# EAGLE board RJ45_Connectors_Board (EAGLE 7.1.0)
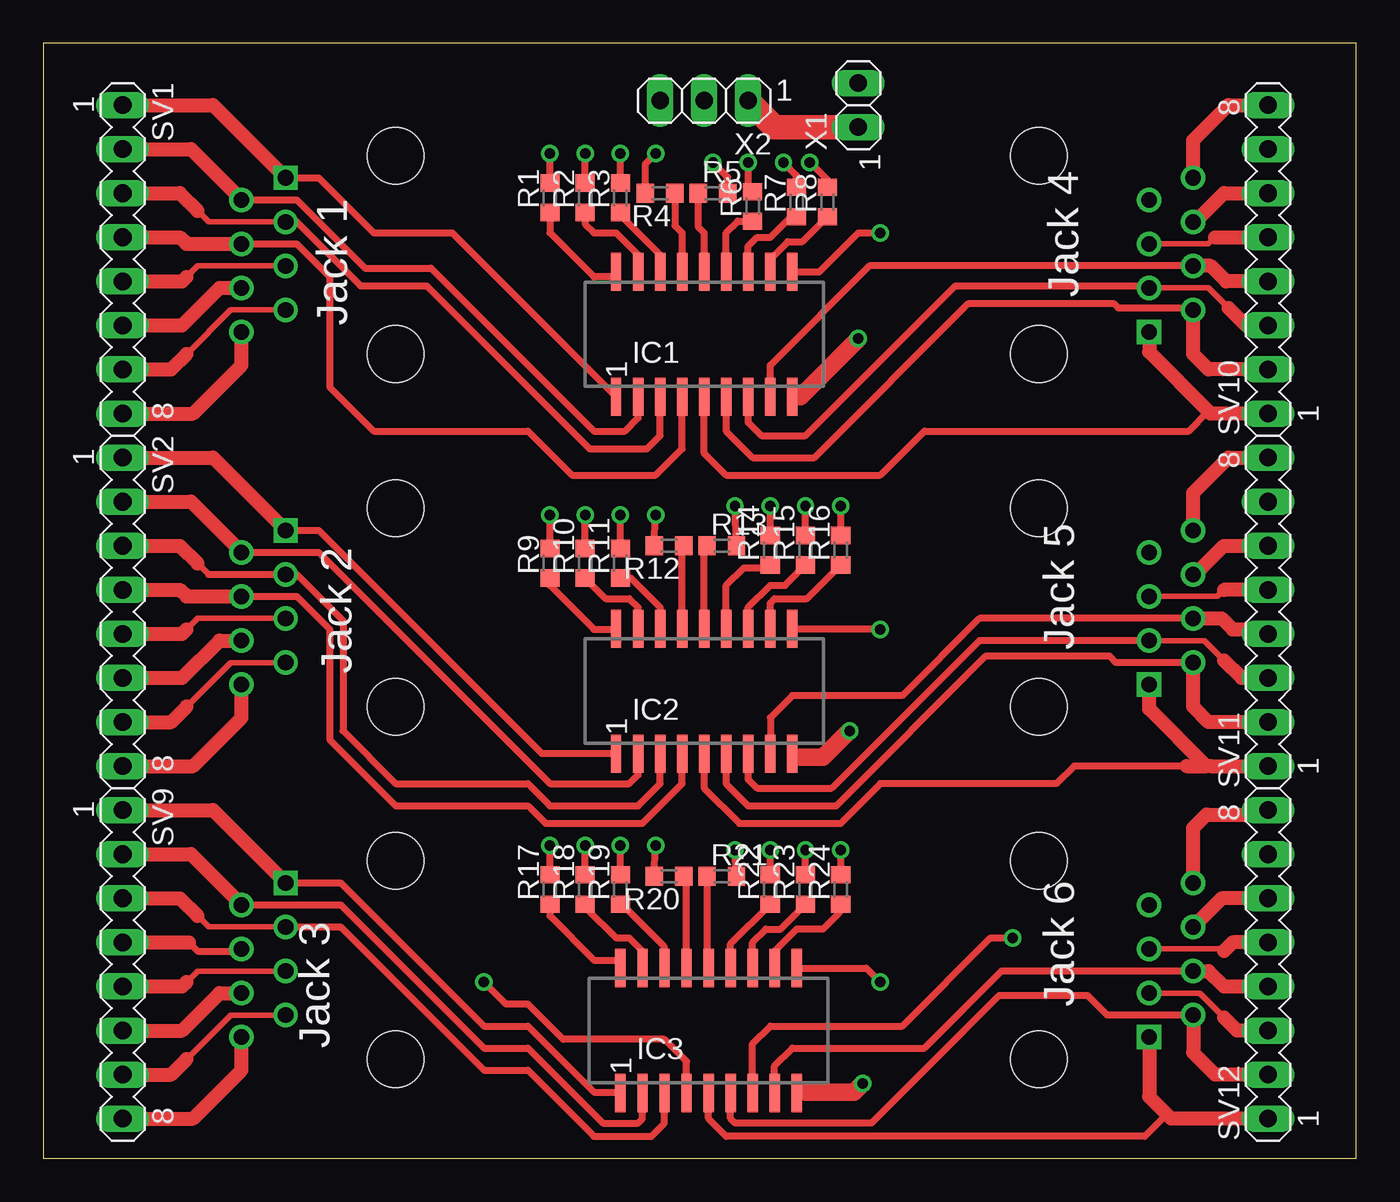
[diagram p0: board, top side]
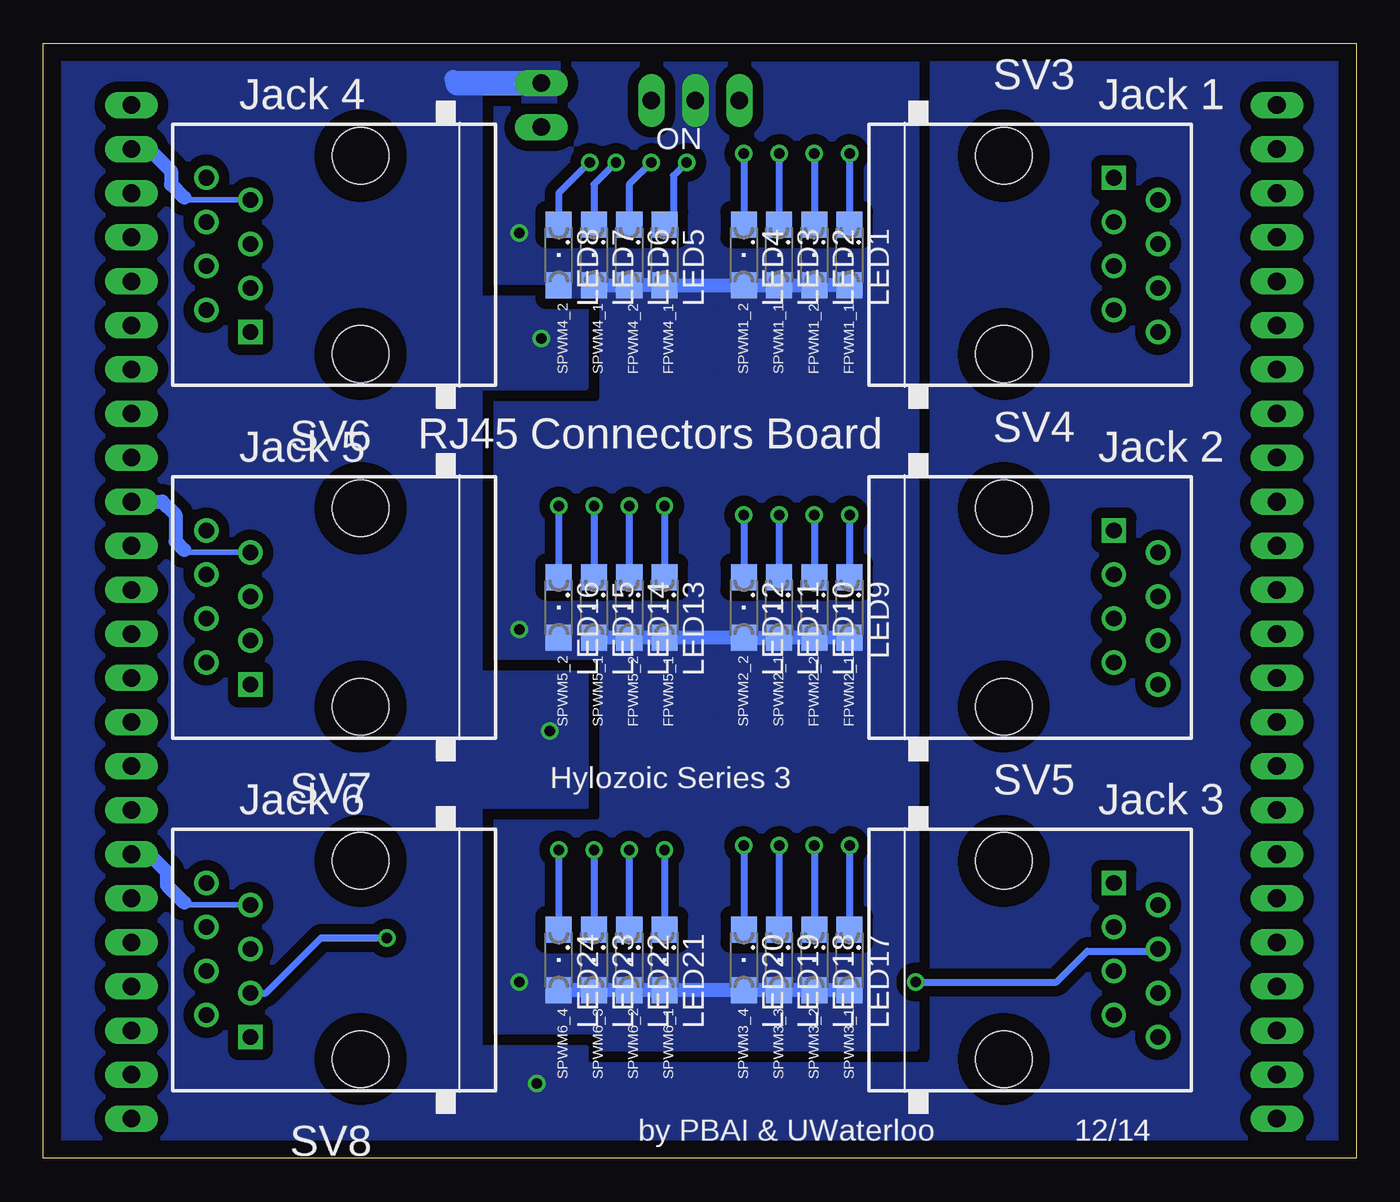
[diagram p1: board, bottom side, seen from below]

Size 75.69 x 64.26 mm. Coordinates in mm from the lower left corner, seen from the top.
Outline: 0,0 75.69,0 75.69,64.26 0,64.26 0,0
Copper layers (1*16): Top 0.035mm / dielectric 1.5mm / Bottom 0.035mm
Design rules "default *": minimum track width 10mil, minimum drill 20mil, track to track 8mil, track to pad 8mil, pad to pad 8mil, via to via 8mil, smd to smd 8mil, copper to edge 40mil, drill to drill 8mil, minimum pad ring 10mil, minimum via ring 8mil, stop-mask expansion 4mil, vias tented up to drill 0mil, thermal gap 10mil

## Footprints (pad centres in the part's own frame; a part is rotated, then mirrored left to right if it is on the bottom)
SOP18 = smd 0.6 x 2.2: 1 -5.08,-3.6; 2 -3.81,-3.6; 3 -2.54,-3.6; 4 -1.27,-3.6; 5 0,-3.6; 6 1.27,-3.6; 7 2.54,-3.6; 8 3.81,-3.6; 9 5.08,-3.6; 10 5.08,3.6; 11 3.81,3.6; 12 2.54,3.6; 13 1.27,3.6; 14 0,3.6; 15 -1.27,3.6; 16 -2.54,3.6; 17 -3.81,3.6; 18 -5.08,3.6
SML1206 = smd 1.5 x 1.5: A 1.75,0; C -1.75,0
R0603 = smd 1 x 1.1: 1 -0.85,0; 2 0.85,0
MA08-1 = drill 1.016 long: 1 -8.89,0; 2 -6.35,0; 3 -3.81,0; 4 -1.27,0; 5 1.27,0; 6 3.81,0; 7 6.35,0; 8 8.89,0
RJ45-NO-SHIELD = drill 0.9 pad 1.4 square: 1 -4.445,6.35 | drill 0.9 pad 1.4: 2 -3.175,8.89; 3 -1.905,6.35; 4 -0.635,8.89; 5 0.635,6.35; 6 1.905,8.89; 7 3.175,6.35; 8 4.445,8.89 | hole 3.251: -5.715,0; 5.715,0
1X02 = drill 1.016 long: 1 -1.27,0; 2 1.27,0
1X03 = drill 1.016 long: 1 -2.54,0; 2 0,0; 3 2.54,0

## Placement (x,y rotation side)
IC1  [SOP18]  38.1,47.5 0 top
IC2  [SOP18]  38.1,26.92 0 top
IC3  [SOP18]  38.35,7.37 0 top
LED1  [SML1206]  29.21,52.07 270 bottom
LED2  [SML1206]  31.24,52.07 270 bottom
LED3  [SML1206]  33.27,52.07 270 bottom
LED4  [SML1206]  35.31,52.07 270 bottom
LED5  [SML1206]  39.88,52.07 270 bottom
LED6  [SML1206]  41.91,52.07 270 bottom
LED7  [SML1206]  43.94,52.07 270 bottom
LED8  [SML1206]  45.97,52.07 270 bottom
LED9  [SML1206]  29.21,31.75 270 bottom
LED10  [SML1206]  31.24,31.75 270 bottom
LED11  [SML1206]  33.27,31.75 270 bottom
LED12  [SML1206]  35.31,31.75 270 bottom
LED13  [SML1206]  39.88,31.75 270 bottom
LED14  [SML1206]  41.91,31.75 270 bottom
LED15  [SML1206]  43.94,31.75 270 bottom
LED16  [SML1206]  45.97,31.75 270 bottom
LED17  [SML1206]  29.21,11.43 270 bottom
LED18  [SML1206]  31.24,11.43 270 bottom
LED19  [SML1206]  33.27,11.43 270 bottom
LED20  [SML1206]  35.31,11.43 270 bottom
LED21  [SML1206]  39.88,11.43 270 bottom
LED22  [SML1206]  41.91,11.43 270 bottom
LED23  [SML1206]  43.94,11.43 270 bottom
LED24  [SML1206]  45.97,11.43 270 bottom
R1  470  [R0603]  29.21,55.37 90 top
R2  470  [R0603]  31.24,55.37 90 top
R3  470  [R0603]  33.27,55.37 90 top
R4  470  [R0603]  35.56,55.63 180 top
R5  470  [R0603]  38.61,55.63 0 top
R6  470  [R0603]  40.89,54.86 90 top
R7  470  [R0603]  43.43,55.12 90 top
R8  470  [R0603]  45.21,55.12 90 top
R9  470  [R0603]  29.21,34.29 90 top
R10  470  [R0603]  31.24,34.29 90 top
R11  470  [R0603]  33.27,34.29 90 top
R12  470  [R0603]  36.07,35.31 180 top
R13  470  [R0603]  39.12,35.31 0 top
R14  470  [R0603]  41.91,35.05 90 top
R15  470  [R0603]  43.94,35.05 90 top
R16  470  [R0603]  45.97,35.05 90 top
R17  470  [R0603]  29.21,15.49 90 top
R18  470  [R0603]  31.24,15.49 90 top
R19  470  [R0603]  33.27,15.49 90 top
R20  470  [R0603]  36.07,16.26 180 top
R21  470  [R0603]  39.12,16.26 0 top
R22  470  [R0603]  41.91,15.49 90 top
R23  470  [R0603]  43.94,15.49 90 top
R24  470  [R0603]  45.97,15.49 90 top
SV1  [MA08-1]  4.57,51.82 270 top
SV2  [MA08-1]  4.57,31.5 270 top
SV3  RJ45-8X  [RJ45-NO-SHIELD]  20.32,52.07 270 bottom
SV4  RJ45-8X  [RJ45-NO-SHIELD]  20.32,31.75 270 bottom
SV5  RJ45-8X  [RJ45-NO-SHIELD]  20.32,11.43 270 bottom
SV6  RJ45-8X  [RJ45-NO-SHIELD]  57.4,52.07 90 bottom
SV7  RJ45-8X  [RJ45-NO-SHIELD]  57.4,31.75 90 bottom
SV8  RJ45-8X  [RJ45-NO-SHIELD]  57.4,11.43 90 bottom
SV9  [MA08-1]  4.57,11.18 270 top
SV10  [MA08-1]  70.61,51.82 90 top
SV11  [MA08-1]  70.61,31.5 90 top
SV12  [MA08-1]  70.61,11.18 90 top
X1  [1X02]  46.99,60.71 90 top
X2  [1X03]  38.1,60.96 180 top

## Library data of the parts
IC1-IC3 R1-R24 X1 X2 = CBLA_Test_bed_Library
LED1-LED24 = led
SV1 SV2 SV9-SV12 = con-lstb; OC_FARNELL: unknown; OC_NEWARK: unknown
SV3-SV8 = CBLA_Test_bed_Library; MPN: RJ45-8X; OC_FARNELL: unknown; OC_NEWARK: 16R6101

## Nets
+5V: IC1.10 IC2.10 IC3.10 LED1.A LED2.A LED3.A LED4.A LED5.A LED6.A LED7.A LED8.A LED9.A LED10.A LED11.A LED12.A LED13.A LED14.A LED15.A LED16.A LED17.A LED18.A LED19.A LED20.A LED21.A LED22.A LED23.A LED24.A X2.2
+5VJUMP: X1.1 X2.1
A0: SV8.5 SV12.5
A1: SV8.6 SV12.6
A2: SV7.5 SV11.5
A3: SV7.6 SV11.6
A8: SV6.5 SV10.5
A9: SV6.6 SV10.6
A11: SV1.5 SV3.5
A12: SV2.5 SV4.5
A13: SV1.6 SV3.6
A15: SV2.6 SV4.6
A16: SV5.5 SV9.5
A17: SV5.6 SV9.6
FPWM_1_1: IC1.1 SV1.1 SV3.1
FPWM_1_2: IC1.2 SV1.2 SV3.2
FPWM_2_1: IC2.1 SV2.1 SV4.1
FPWM_2_2: IC2.2 SV2.2 SV4.2
FPWM_4_1: IC1.5 SV6.1 SV10.1
FPWM_4_2: IC1.6 SV6.2 SV10.2
FPWM_5_1: IC2.5 SV7.1 SV11.1
FPWM_5_2: IC2.6 SV7.2 SV11.2
GND: IC1.9 IC2.9 IC3.9 X1.2
MUL_SCL_1: SV1.7 SV3.7
MUL_SCL_2: SV2.7 SV4.7
MUL_SCL_3: SV5.7 SV9.7
MUL_SCL_4: SV6.7 SV10.7
MUL_SCL_5: SV7.7 SV11.7
MUL_SCL_6: SV8.7 SV12.7
MUL_SDA_1: SV1.8 SV3.8
MUL_SDA_2: SV2.8 SV4.8
MUL_SDA_3: SV5.8 SV9.8
MUL_SDA_4: SV6.8 SV10.8
MUL_SDA_5: SV7.8 SV11.8
MUL_SDA_6: SV8.8 SV12.8
N$1: IC1.18 R1.1
N$2: LED1.C R1.2
N$3: IC1.17 R2.1
N$4: IC1.16 R3.1
N$5: IC1.15 R4.1
N$6: IC1.14 R5.1
N$7: IC1.13 R6.1
N$8: IC1.12 R7.1
N$10: IC1.11 R8.1
N$11: LED2.C R2.2
N$12: LED3.C R3.2
N$13: LED4.C R4.2
N$14: LED5.C R5.2
N$15: LED6.C R6.2
N$16: LED7.C R7.2
N$17: LED8.C R8.2
N$18: IC2.18 R9.1
N$19: LED9.C R9.2
N$20: IC2.17 R10.1
N$21: IC2.16 R11.1
N$22: IC2.15 R12.1
N$23: IC2.14 R13.1
N$24: IC2.13 R14.1
N$25: IC2.12 R15.1
N$26: IC2.11 R16.1
N$27: LED10.C R10.2
N$28: LED11.C R11.2
N$29: LED12.C R12.2
N$30: LED13.C R13.2
N$31: LED14.C R14.2
N$32: LED15.C R15.2
N$33: LED16.C R16.2
N$34: IC3.18 R17.1
N$35: LED17.C R17.2
N$36: IC3.17 R18.1
N$37: IC3.16 R19.1
N$38: IC3.15 R20.1
N$39: IC3.14 R21.1
N$40: IC3.13 R22.1
N$41: IC3.12 R23.1
N$42: IC3.11 R24.1
N$43: LED18.C R18.2
N$44: LED19.C R19.2
N$45: LED20.C R20.2
N$46: LED21.C R21.2
N$47: LED22.C R22.2
N$48: LED23.C R23.2
N$49: LED24.C R24.2
SPWM_1_1: IC1.3 SV1.3 SV3.3
SPWM_1_2: IC1.4 SV1.4 SV3.4
SPWM_2_1: IC2.3 SV2.3 SV4.3
SPWM_2_2: IC2.4 SV2.4 SV4.4
SPWM_3_1: IC3.1 SV5.1 SV9.1
SPWM_3_2: IC3.2 SV5.2 SV9.2
SPWM_3_3: IC3.3 SV5.3 SV9.3
SPWM_3_4: IC3.4 SV5.4 SV9.4
SPWM_4_1: IC1.7 SV6.3 SV10.3
SPWM_4_2: IC1.8 SV6.4 SV10.4
SPWM_5_1: IC2.7 SV7.3 SV11.3
SPWM_5_2: IC2.8 SV7.4 SV11.4
SPWM_6_1: IC3.5 SV8.1 SV12.1
SPWM_6_2: IC3.6 SV8.2 SV12.2
SPWM_6_3: IC3.7 SV8.3 SV12.3
SPWM_6_4: IC3.8 SV8.4 SV12.4

## Tracks (layer width: path | path; a pad name or v marks a point on that pad's centre or on a via)
+5V  (via drill 0.6)
  Top 0.406: IC1.10 44.75,51.1 46.99,53.34 v48.26,53.34 | IC2.10 48.22,30.52 v48.26,30.48 | IC3.10 47.45,10.97 v48.26,10.16
  Bottom 0.813: LED7.A LED6.A LED5.A LED4.A LED3.A LED2.A LED1.A | LED15.A LED14.A LED13.A LED12.A LED11.A LED10.A LED9.A | LED17.A LED18.A LED19.A LED20.A LED21.A LED22.A LED23.A LED24.A
  pour Bottom (isolate 0.61, rank 2, no thermals, hatched): 25.4,63.5 25.4,6.35 49.53,6.35 49.53,63.5
+5VJUMP
  Top 1.422: X2.1 42.16,59.44 X1.1
A0
  Top 0.305: SV8.5 67.94,12.06 68.07,11.94
  Top 0.813: SV12.5 68.58,12.45 68.07,11.94
A1
  Top 0.813: SV12.6 67.94,14.99 SV8.6
A2
  Top 0.305: 68.07,32.77 67.69,32.39 SV7.5
  Top 0.813: SV11.5 68.07,32.77
A3
  Top 0.813: SV7.6 66.42,33.66 68.07,35.31 SV11.6
A8
  Top 0.305: SV6.5 67.18,52.7 67.56,53.09
  Top 0.813: 67.56,53.09 SV10.5
A9
  Top 0.813: SV6.6 66.42,53.97 68.07,55.63 SV10.6
A11
  Top 0.305: 8.26,50.8 8.89,51.43 SV3.5
  Top 0.813: SV1.5 8,50.55 8.26,50.8
A12
  Top 0.305: 8.26,30.48 8.89,31.11 SV4.5
  Top 0.813: SV2.5 8,30.23 8.26,30.48
A13
  Top 0.813: SV1.6 8,48.01 10.16,50.16 SV3.6
A15
  Top 0.813: SV2.6 8,27.69 10.16,29.84 SV4.6
A16
  Top 0.305: 8.26,10.16 8.89,10.79 SV5.5
  Top 0.813: SV9.5 8,9.91 8.26,10.16
A17
  Top 0.813: SV9.6 8,7.37 10.16,9.52 SV5.6
FPWM_1_1
  Top 0.406: SV3.1 15.88,56.52 19.05,53.34 23.58,53.34 IC1.1
  Top 0.813: SV1.1 9.78,60.71 SV3.1
FPWM_1_2
  Top 0.406: SV3.2 14.61,55.24 18.54,51.31 22.35,51.31 31.75,41.91 33.53,41.91 34.29,42.67 IC1.2
  Top 0.813: SV1.2 8.51,58.17 SV3.2
FPWM_2_1
  Top 0.406: SV4.1 15.88,36.19 27.3,24.76 27.94,24.13 28.75,23.32 IC2.1
  Top 0.813: SV2.1 9.78,40.39 SV4.1
FPWM_2_2
  Top 0.406: SV4.2 15.88,34.92 29.21,21.59 33.78,21.59 34.29,22.1 IC2.2
  Top 0.813: SV2.2 8.51,37.85 SV4.2
FPWM_4_1
  Top 0.406: IC1.5 38.1,40.64 39.37,39.37 48.26,39.37 50.8,41.91 66.04,41.91 67.18,43.05
  Top 0.813: SV10.1 67.31,42.93 67.18,43.05 63.75,46.48 SV6.1
FPWM_4_2
  Top 0.406: IC1.6 39.37,41.91 40.89,40.39 44.45,40.39 53.34,49.28 61.72,49.28 61.98,49.02 66.17,49.02 SV6.2
  Top 0.813: SV10.2 67.18,45.47 66.29,46.36 SV6.2
FPWM_5_1
  Top 0.406: IC2.5 38.1,21.34 40.13,19.3 45.97,19.3 48.26,21.59 58.42,21.59 59.44,22.61 67.31,22.61
  Top 0.813: 65.91,22.61 67.06,22.61 | SV11.1 67.31,22.61 67.06,22.61 | 67.06,22.61 63.75,25.91 SV7.1
FPWM_5_2
  Top 0.406: IC2.6 39.37,21.59 40.64,20.32 45.72,20.32 54.36,28.96 61.47,28.96 61.85,28.57 SV7.2
  Top 0.813: SV11.2 67.18,25.15 66.29,26.04 SV7.2
GND  (via drill 0.6)
  Top 0.406: IC1.9 43.64,43.9 | IC3.9 43.64,3.77 43.69,3.81 | 43.43,23.37 43.43,23.11 43.18,22.86 IC2.9 43.39,23.11 43.69,23.11
  Top 0.61: 43.69,3.81 43.94,3.81
  Top 1.016: 43.64,43.9 v46.99,47.24 | v46.48,24.64 44.96,23.11 43.69,23.11 | v47.24,4.32 46.74,3.81 43.94,3.81
  Bottom 1.016: 51.82,61.98 52.07,62.23
  Bottom 1.422: X1.2 51.82,61.98
  pour Bottom (isolate 0.61, rank 3, no thermals, hatched): 0,64.77 76.2,64.77 76.2,0 0,0
  pour Bottom (isolate 0.61, no thermals, hatched): 44.45,26.67 44.45,20.32 54.61,20.32 54.61,27.94 44.45,27.94
  pour Bottom (isolate 0.61, no thermals, hatched): 54.61,6.35 44.45,6.35 44.45,1.27 54.61,1.27
  pour Bottom (isolate 0.61, no thermals, hatched): 54.61,49.53 44.45,49.53 44.45,44.45 54.61,44.45
MUL_SCL_1
  Top 0.305: 8.26,46.36 10.79,48.89 SV3.7
  Top 0.813: SV1.7 7.37,45.47 8.26,46.36
MUL_SCL_2
  Top 0.305: 8.26,26.04 10.79,28.57 SV4.7
  Top 0.813: SV2.7 7.37,25.15 8.26,26.04
MUL_SCL_3
  Top 0.305: 8.26,5.71 10.79,8.25 SV5.7
  Top 0.813: SV9.7 7.37,4.83 8.26,5.71
MUL_SCL_4
  Bottom 0.305: SV6.7 67.44,55.24 67.56,55.37
  Bottom 0.813: SV10.7 69.6,58.17 68.33,56.9 68.33,56.13 67.56,55.37
MUL_SCL_5
  Bottom 0.305: SV7.7 67.44,34.92 67.56,35.05
  Bottom 0.813: SV11.7 68.83,37.85 68.07,37.08 68.07,35.56 67.56,35.05
MUL_SCL_6
  Bottom 0.305: SV8.7 67.44,14.6 67.56,14.73
  Bottom 0.813: SV12.7 69.6,17.53 68.58,16.51 68.58,15.75 67.56,14.73
MUL_SDA_1
  Top 0.813: SV1.8 8.64,42.93 11.43,45.72 SV3.8
MUL_SDA_2
  Top 0.813: SV2.8 8.64,22.61 11.43,25.4 SV4.8
MUL_SDA_3
  Top 0.813: SV9.8 8.64,2.29 11.43,5.08 SV5.8
MUL_SDA_4
  Top 0.813: SV6.8 66.29,58.67 68.33,60.71 SV10.8
MUL_SDA_5
  Top 0.813: SV7.8 66.29,38.35 68.33,40.39 SV11.8
MUL_SDA_6
  Top 0.813: SV8.8 66.29,19.05 67.06,19.81 70.36,19.81 SV12.8
N$1
  Top 0.406: R1.1 29.21,53.34 31.75,50.8 32.72,50.8 IC1.18
N$2  (via drill 0.6)
  Top 0.406: R1.2 v29.21,57.91
  Bottom 0.406: v29.21,57.91 LED1.C
N$3
  Top 0.406: IC1.17 34.29,52.07 33.02,53.34 31.75,53.34 31.24,53.85 R2.1
N$4
  Top 0.406: R3.1 33.27,54.36 35.56,52.07 IC1.16
N$5
  Top 0.406: R4.1 36.41,53.76 36.83,53.34 IC1.15
N$6
  Top 0.406: R5.1 37.76,53.68 38.1,53.34 IC1.14
N$7
  Top 0.406: IC1.13 39.37,53.34 40.04,54.01 R6.1
N$8
  Top 0.406: IC1.12 40.64,52.58 41.15,53.09 41.91,53.09 43.09,54.27 R7.1
N$10
  Top 0.406: IC1.11 41.91,51.82 42.93,52.83 43.78,52.83 R8.1
N$11  (via drill 0.6)
  Top 0.406: R2.2 v31.24,57.91
  Bottom 0.406: v31.24,57.91 LED2.C
N$12  (via drill 0.6)
  Top 0.406: R3.2 v33.27,57.91
  Bottom 0.406: v33.27,57.91 LED3.C
N$13  (via drill 0.6)
  Top 0.406: R4.2 34.71,57.32 v35.31,57.91
  Bottom 0.406: v35.31,57.91 LED4.C
N$14  (via drill 0.6)
  Top 0.406: R5.2 39.46,56.55 v38.61,57.4
  Bottom 0.406: v38.61,57.4 39.37,56.64 39.37,53.34 39.85,53.82 LED5.C
N$15  (via drill 0.6)
  Top 0.406: v40.64,57.4 40.64,55.97 R6.2
  Bottom 0.406: v40.64,57.4 41.91,56.13 LED6.C
N$16  (via drill 0.6)
  Top 0.406: R7.2 43.43,56.64 v42.67,57.4
  Bottom 0.406: v42.67,57.4 43.94,56.13 LED7.C
N$17  (via drill 0.6)
  Top 0.406: R8.2 45.21,56.39 v44.2,57.4
  Bottom 0.406: v44.2,57.4 45.97,55.63 LED8.C
N$18
  Top 0.406: R9.1 29.21,33.02 31.75,30.48 32.81,30.48 IC2.18
N$19  (via drill 0.6)
  Top 0.406: R9.2 v29.21,37.08
  Bottom 0.406: v29.21,37.08 LED9.C
N$20
  Top 0.406: IC2.17 34.29,31.75 33.78,32.26 32.42,32.26 R10.1
N$21
  Top 0.406: R11.1 33.87,33.44 35.56,31.75 IC2.16
N$22
  Top 0.406: IC2.15 36.83,35.22 R12.1
N$23
  Top 0.406: IC2.14 38.1,35.14 R13.1
N$24
  Top 0.406: IC2.13 39.37,33.02 40.39,34.04 41.74,34.04 R14.1
N$25
  Top 0.406: 40.64,30.48 IC2.12 40.64,31.75 41.91,33.02 42.76,33.02 R15.1
N$26
  Top 0.406: IC2.11 41.91,32 42.16,32.26 44.03,32.26 R16.1
N$27  (via drill 0.6)
  Top 0.406: R10.2 v31.24,37.08
  Bottom 0.406: v31.24,37.08 LED10.C
N$28  (via drill 0.6)
  Top 0.406: R11.2 v33.27,37.08
  Bottom 0.406: v33.27,37.08 LED11.C
N$29  (via drill 0.6)
  Top 0.406: R12.2 v35.31,37.08
  Bottom 0.406: v35.31,37.08 LED12.C
N$30  (via drill 0.6)
  Top 0.406: R13.2 v39.88,37.59
  Bottom 0.406: v39.88,37.59 LED13.C
N$31  (via drill 0.6)
  Top 0.406: R14.2 v41.91,37.59
  Bottom 0.406: v41.91,37.59 LED14.C
N$32  (via drill 0.6)
  Top 0.406: R15.2 v43.94,37.59
  Bottom 0.406: v43.94,37.59 LED15.C
N$33  (via drill 0.6)
  Top 0.406: R16.2 v45.97,37.59
  Bottom 0.406: v45.97,37.59 LED16.C
N$34
  Top 0.406: R17.1 29.21,13.97 31.75,11.43 33.27,11.43 IC3.18 33.27,10.41
N$35  (via drill 0.6)
  Top 0.406: R17.2 v29.21,18.03
  Bottom 0.406: v29.21,18.03 LED17.C
N$36
  Top 0.406: R18.1 31.33,14.64 31.33,14.39 33.02,12.7 33.78,12.7 34.54,11.94 IC3.17
N$37
  Top 0.406: R19.1 33.36,14.64 35.81,12.19 IC3.16
N$38
  Top 0.406: IC3.15 37.08,16.09 R20.1
N$39
  Top 0.406: R21.1 38.27,11.05 IC3.14
N$40
  Top 0.406: IC3.13 39.62,12.36 R22.1
N$41
  Top 0.406: 43.94,14.48 R23.1 42.51,13.21 41.66,13.21 40.89,12.45 IC3.12
N$42
  Top 0.406: R24.1 45.89,14.64 45.89,14.14 44.96,13.21 43.43,13.21 42.16,11.94 IC3.11
N$43  (via drill 0.6)
  Top 0.406: R18.2 v31.24,18.03
  Bottom 0.406: v31.24,18.03 LED18.C
N$44  (via drill 0.6)
  Top 0.406: R19.2 v33.27,18.03
  Bottom 0.406: v33.27,18.03 LED19.C
N$45  (via drill 0.6)
  Top 0.406: R20.2 v35.31,18.03
  Bottom 0.406: v35.31,18.03 LED20.C
N$46  (via drill 0.6)
  Top 0.406: R21.2 v39.88,17.78
  Bottom 0.406: v39.88,17.78 LED21.C
N$47  (via drill 0.6)
  Top 0.406: R22.2 v41.91,17.78
  Bottom 0.406: v41.91,17.78 LED22.C
N$48  (via drill 0.6)
  Top 0.406: R23.2 v43.94,17.78
  Bottom 0.406: v43.94,17.78 LED23.C
N$49  (via drill 0.6)
  Top 0.406: R24.2 v45.97,17.78
  Bottom 0.406: v45.97,17.78 LED24.C
SPWM_1_1
  Top 0.305: 8.89,54.61 9.53,53.97 SV3.3
  Top 0.406: SV3.3 14.61,53.97 18.29,50.29 22.1,50.29 31.5,40.89 34.8,40.89 35.56,41.66 IC1.3
  Top 0.813: SV1.3 7.87,55.63 8.89,54.61
SPWM_1_2
  Top 0.406: SV3.4 14.61,52.7 16.51,50.8 16.51,44.45 19.05,41.91 27.94,41.91 30.48,39.37 35.31,39.37 36.83,40.89 IC1.4
  Top 0.813: SV1.4 7.87,53.09 8.26,52.7 SV3.4
SPWM_2_1
  Top 0.305: 8.89,34.29 9.53,33.66 SV4.3
  Top 0.406: 9.53,33.66 14.61,33.66 17.27,30.99 17.27,24.64 20.32,21.59 27.94,21.59 29.21,20.32 34.29,20.32 35.56,21.59 IC2.3
  Top 0.813: SV2.3 7.87,35.31 8.89,34.29
SPWM_2_2
  Top 0.406: 8.26,32.39 14.61,32.39 16.51,30.48 16.51,24.13 20.32,20.32 27.94,20.32 28.96,19.3 34.54,19.3 36.83,21.59 IC2.4
  Top 0.813: SV2.4 7.87,32.77 8.26,32.39 SV4.4
SPWM_3_1
  Top 0.406: SV5.1 17.14,15.87 25.4,7.62 27.94,7.62 31.75,3.81 33.23,3.81 IC3.1
  Top 0.813: SV9.1 9.78,20.07 SV5.1
SPWM_3_2
  Top 0.406: SV5.2 17.14,14.6 25.4,6.35 27.94,6.35 32.26,2.03 34.29,2.03 34.54,2.29 IC3.2
  Top 0.813: SV9.2 8.51,17.53 SV5.2
SPWM_3_3
  Top 0.305: 8.89,13.97 9.53,13.33 SV5.3
  Top 0.406: SV5.3 17.14,13.33 25.4,5.08 27.94,5.08 31.75,1.27 35.05,1.27 35.81,2.03 IC3.3
  Top 0.813: SV9.3 7.87,14.99 8.89,13.97
SPWM_3_4  (via drill 0.6)
  Top 0.406: 8.38,12.45 8.89,11.94 11.3,11.94 SV5.4 | IC3.4 37.08,5.59 35.81,6.86 29.97,6.86 27.94,8.89 26.67,8.89 v25.4,10.16
  Top 0.813: SV9.4 8.38,12.45
  Bottom 0.406: v25.4,10.16 17.27,10.16 15.49,11.94 11.56,11.94 SV5.4
SPWM_4_1
  Top 0.305: SV6.3 67.18,50.16 68.33,49.02
  Top 0.406: IC1.7 40.64,42.42 41.4,41.66 43.94,41.66 52.58,50.29 63.63,50.29 SV6.3
  Top 0.813: SV10.3 69.34,48.01 68.33,49.02
SPWM_4_2
  Top 0.406: IC1.8 41.91,45.72 47.62,51.43 SV6.4
  Top 0.813: SV10.4 68.2,50.55 67.31,51.43 SV6.4
SPWM_5_1
  Top 0.305: SV7.3 66.93,29.84 68.07,28.7
  Top 0.406: IC2.7 40.64,21.84 41.15,21.34 45.47,21.34 53.98,29.84 SV7.3
  Top 0.813: SV11.3 69.09,27.69 68.07,28.7
SPWM_5_2
  Top 0.406: SV7.4 53.98,31.11 49.53,26.67 43.18,26.67 41.91,25.4 IC2.8
  Top 0.813: SV7.4 67.94,31.11 68.58,30.48 70.36,30.48 SV11.4
SPWM_6_1
  Top 0.406: IC3.5 38.35,2.29 39.37,1.27 63.5,1.27 64.77,2.54
  Top 0.813: SV8.1 63.75,3.56 64.77,2.54 65.02,2.29 SV12.1
SPWM_6_2
  Top 0.406: IC3.6 39.62,2.29 39.88,2.03 47.75,2.03 55.12,9.4 60.2,9.4 60.83,8.76 61.21,8.38 61.34,8.25 SV8.2
  Top 0.813: SV8.2 66.29,6.1 67.56,4.83 SV12.2
SPWM_6_3  (via drill 0.6)
  Top 0.305: SV8.3 66.67,9.52 68.07,8.13
  Top 0.406: IC3.7 40.89,6.6 41.91,7.62 49.53,7.62 54.61,12.7 v55.88,12.7
  Top 0.813: SV12.3 68.83,7.37 68.07,8.13
  Bottom 0.406: SV8.3 62.87,9.52 59.69,12.7 v55.88,12.7
SPWM_6_4
  Top 0.406: IC3.8 42.16,5.33 43.18,6.35 50.8,6.35 55.24,10.79 SV8.4
  Top 0.813: SV12.4 68.07,9.91 67.18,10.79 SV8.4

## Text on the board
tPlace: Jack 4 | Jack 1 | Jack 5 | Jack 2 | Jack 6 | Jack 3
bPlace: Jack 1 | Jack 4 | ON | FPWM1_1 | FPWM1_2 | SPWM1_1 | SPWM1_2 | FPWM4_1 | FPWM4_2 | SPWM4_1 | SPWM4_2 | Jack 2 | Jack 5 | RJ45 Connectors Board | FPWM2_1 | FPWM2_2 | SPWM2_1 | SPWM2_2 | FPWM5_1 | FPWM5_2 | SPWM5_1 | SPWM5_2 | Jack 3 | Hylozoic Series 3 | Jack 6 | SPWM3_1 | SPWM3_2 | SPWM3_3 | SPWM3_4 | SPWM6_1 | SPWM6_2 | SPWM6_3 | SPWM6_4 | 12/14 | by PBAI & UWaterloo